# Altium PCB MainPCB.PcbDoc (part 3 of 4)
Units mil, origin at the board's own origin, x right, y up, seen from the top; angles counter-clockwise.
Board outline 3543.31 x 3543.31 mil, 2 copper layers (Top Layer, Bottom Layer); 134 components, 141 nets, 686 pads, 3686 vias.
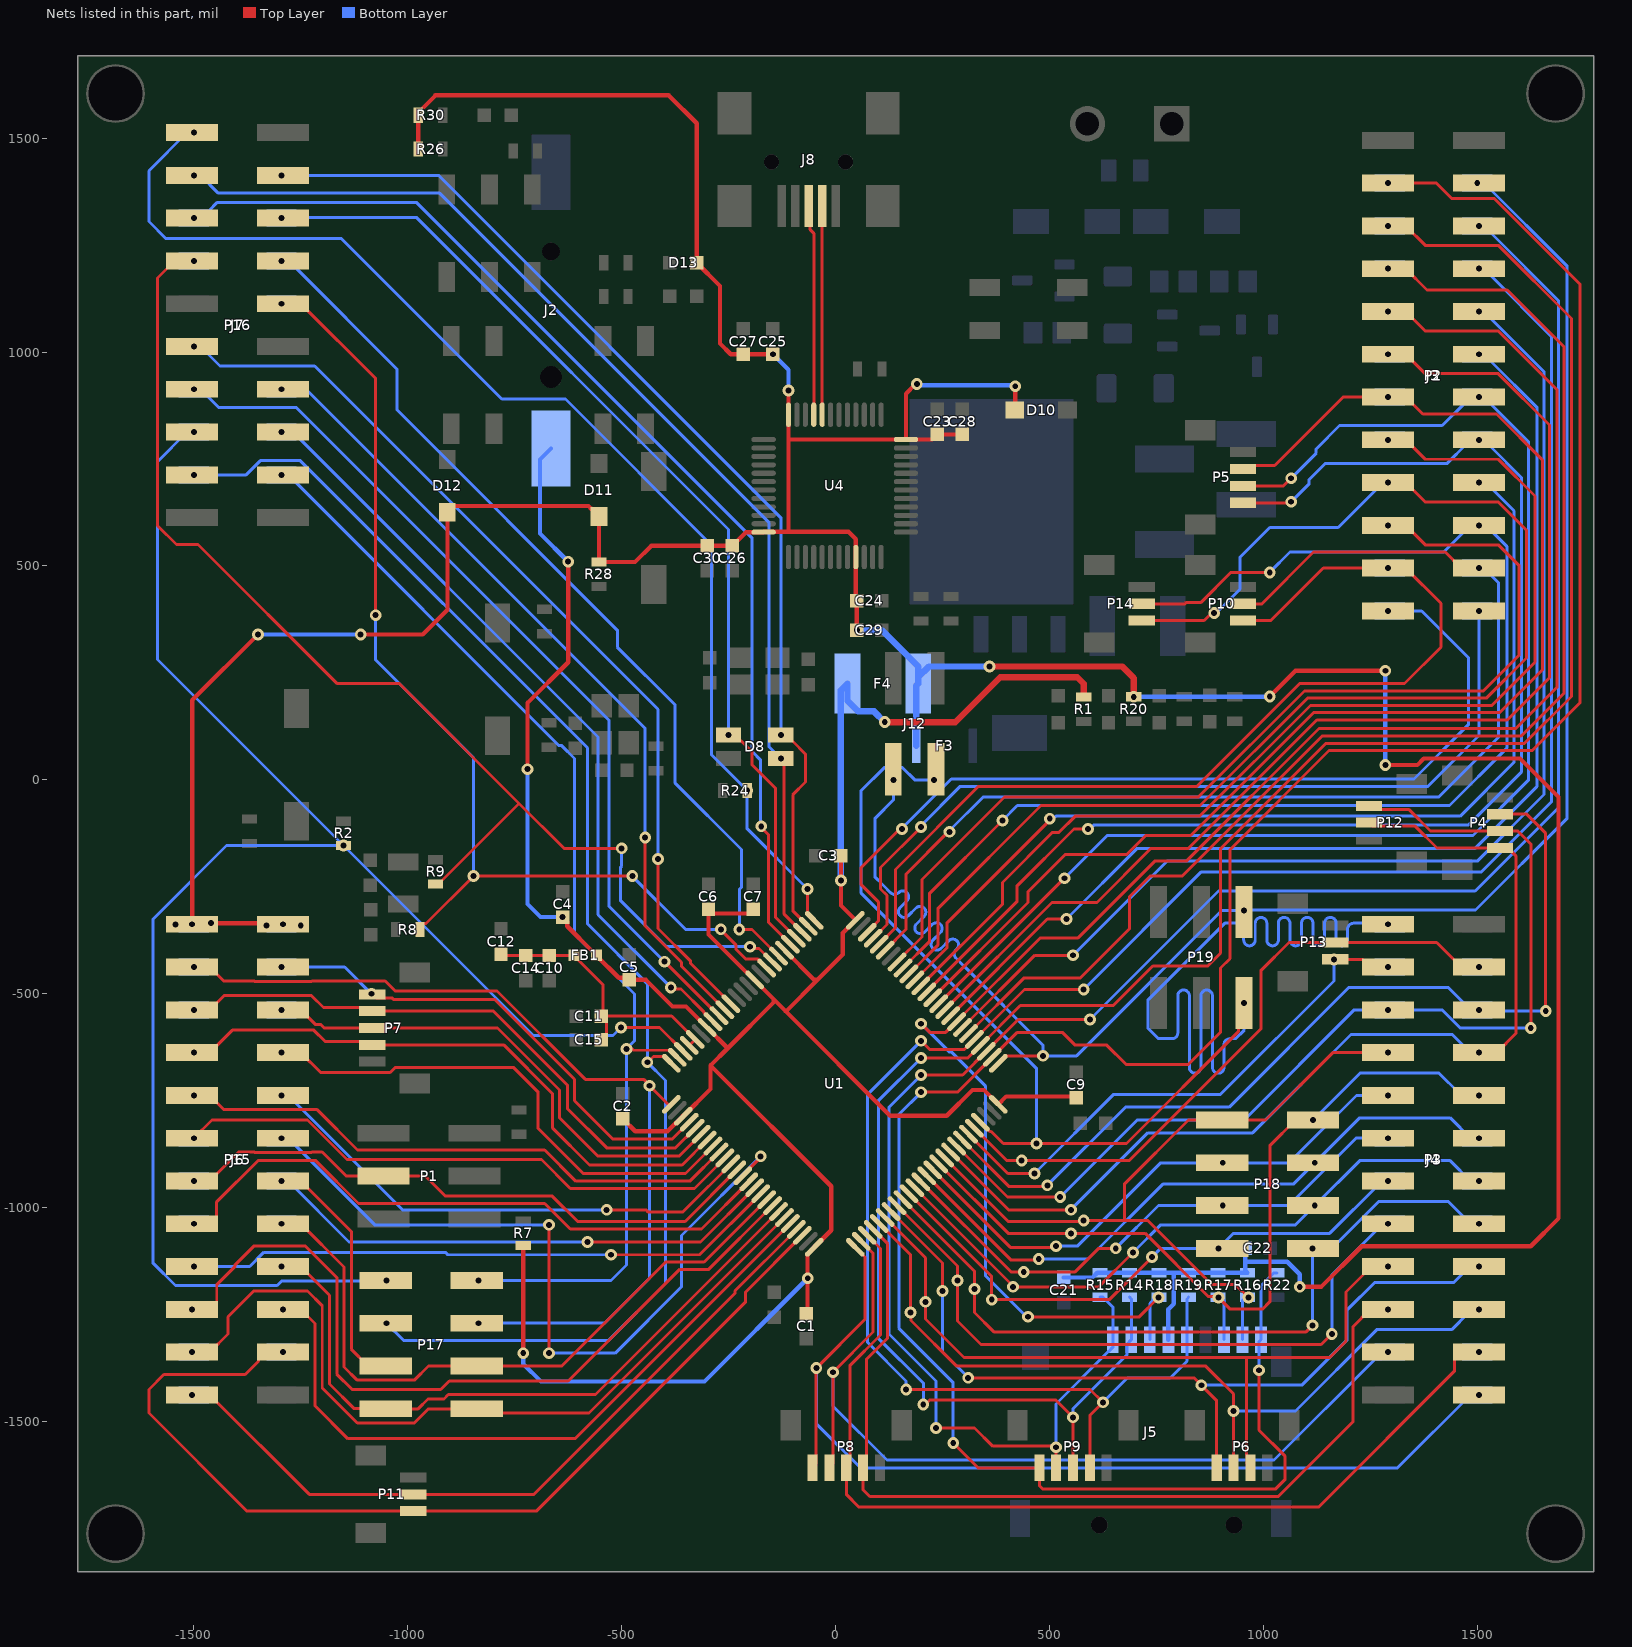
[diagram p2: the nets of this part, all layers, seen from the top]

## Via types
v1: diameter 15/15 (per signal layer), hole 10, Top Layer to Bottom Layer, tented both sides, 3436 vias
v2: diameter 27.56, hole 13.78, Top Layer to Bottom Layer, 250 vias

## Nets (pads, with @x,y where several pads share a name; then routed paths per layer and width w, separated by ;. In a path a pad name is that pad's centre, name@x,y a point inside that pad or via, vN(x,y) a via of type N, cw(c..) or ccw(c..) an arc to the next point about the centre after c; other vN are vias at no path point) (continued)
3V3_MCU: C1.2 C2.2 C3.2 C4.2 C5.2 C6.2 C7.2 C9.2 F4.1 FB1.1 J2.P R1.2 R7.2 U1.6 U1.11 U1.19 U1.28 U1.50 U1.75 U1.100 | length 7027.3
  Top Layer w10: v2(-730,-1340) R7.2@-730,-1088.54 ; v2(-720,25) -720,180 -625,275 v2(-625,510) ; v2(-638,-320.58) -627.25,-331.33 -627.25,-342.16 -568.19,-401.22 -566.22,-401.22 -558.43,-409.02 FB1.1@-558.43,-410 -558.43,-410.98 -506.89,-462.52 -487.01,-462.52 C5.2@-482,-467.53 -443.17,-467.53 -381.09,-529.61 -349.63,-529.61 U1.19@-300.34,-578.89 -252.12,-627.12 ; C2.2@-497,-792.53 -468.03,-821.5 -392.95,-821.5 -357.75,-786.29 U1.28@-356.02,-786.29 -292.36,-722.64 -292.36,-667.36 ; C6.2@-297,-302.53 C6.2@-297,-312.53 ; C7.2@-192,-302.53 -202,-312.53 C6.2@-297,-312.53 ; U1.11@-188.99,-468.45 -188.57,-468.45 -172.08,-484.94 -172.08,-485.36 -144.15,-513.29 ; U1.11@-188.99,-467.54 -190.71,-467.54 -297,-361.25 C6.2@-297,-312.53 ; U1.6@-119.39,-397.94 -50.31,-467.02 -42.02,-467.02 ; C1.2@-68,-1247.47 -65.8,-1245.27 -65.8,-1108.53 U1.50@-49.79,-1092.52 -10,-1052.73 -10,-949.73 -292.36,-667.36 ; C3.2@12.53,-177 v2(12.53,-235.22) 12.53,-293.44 46.25,-327.16 U1.100@46.25,-328.34 16.9,-357.7 16.9,-408.1 -42.02,-467.02 ; C9.2@563,-742.53 560.47,-740 398.77,-740 U1.75@380.32,-758.46 346.86,-725 320,-725 260,-785 127.56,-785 -116.22,-541.22 ; -292.36,-667.36 -252.12,-627.12 ; -252.12,-627.12 -144.15,-519.15 -144.15,-513.29 ; -144.15,-513.29 -116.22,-541.22 ; -116.22,-541.22 -42.02,-467.02
  Top Layer w15: v2(115,135) 280,135 385,240 565,240 580,225 R1.2@580,193.54
  Bottom Layer w10: v2(-730,-1340) -730,-1365 -688.54,-1406.46 -306.46,-1406.46 v2(-65,-1165) ; v2(-720,25) -720,-290 -689.42,-320.58 v2(-638,-320.58) ; J2.P@-665,774.37 -690.75,748.62 -690.75,575.75 v2(-625,510)
  Bottom Layer w15: v2(12.53,-235.22) 12.53,209.53 F4.1@28,225 28,185 53,160 90,160 v2(115,135)
3V3_MCU_VCCA: C10.2 C11.2 C12.2 C14.2 C15.2 FB1.2 U1.21 U1.22 | length 664
  Top Layer w7: C12.2@-782,-407.53 -779,-410.53 C14.2@-724,-410.53 -723.47,-410 -669,-410 FB1.2@-611.57,-410 ; FB1.2@-611.57,-410.98 -544,-478.56 -544,-548.53 C11.2@-547.47,-552 ; C15.2@-547.47,-607 -535.39,-594.92 -535.39,-570.39 ; -535.47,-570.39 -535.47,-560.53 -544,-552 -382.92,-552 U1.21@-328.18,-606.73 U1.22@-342.1,-620.65
3V3_STL: C21.2 C22.2 C23.2 C24.2 C25.2 C26.2 C27.2 C28.2 C29.2 C30.2 D10.K D11.K D12.K D13.2 F3.1 F4.0 J5.4 J6.1 J6.2 P15.1 P15.2 R14.2 R15.2 R16.2 R17.2 R18.2 R19.2 R20.2 R26.2 R28.2 R30.1 U4.9 U4.24 U4.36 U4.48 | length 10316.6
  Top Layer w10: v2(-1503.94,-337.6) -1503.94,186.06 v2(-1350,340) ; v2(-1460,-335) -1335,-335 v2(-1330,-340) ; v2(-1110,340) -965,340 -907.28,397.72 D12.K@-907.28,625.39 -907.28,625.51 -892.8,640 -577.4,640 -570,632.6 -567.44,632.6 -552.95,618.11 D11.K@-552.95,615.55 R28.2@-552.95,509.06 -468.85,509.06 -430.5,547.41 C30.2@-300.05,547.41 C26.2@-240.99,547.41 -209.46,578.94 U4.48@-168.11,578.94 ; R26.2@-975.2,1474.61 R30.1@-975.2,1553.35 -975.2,1560.24 -935.43,1600 -390,1600 -324.61,1534.61 D13.2@-324.61,1208.86 -270,1154.25 -270,1020 -244.95,994.95 C27.2@-215.31,994.95 v2(-146.41,994.95) v2(-146.41,994.95) ; U4.48@-168.11,580 -110,580 ; v2(-110.04,910) U4.36@-110.04,853.54 -110.04,795 ; C29.2@49.44,349.56 C24.2@49.44,418.46 47.44,420.46 U4.9@47.44,520.87 47.44,562.56 30,580 -110,580 ; v2(190,925) 186.91,925 164.57,902.66 U4.24@164.57,795.47 ; C28.2@296.5,807.32 C23.2@237.45,807.32 225.61,795.47 U4.24@164.57,795.47 ; D10.K@418.7,864.37 420,865.67 v2(420,920) ; v2(1015,195) 1075,255 v2(1285,255) ; v2(1085,-1185) 1135,-1185 1230,-1090 1625,-1090 1690,-1025 1690,-40 1600,50 1374.88,50 1359.88,35 v2(1285,35) ; -110.04,795 -110.04,580.04 -110,580 ; -110.04,795 -109.57,795.47 U4.24@164.57,795.47
  Top Layer w15: v2(360,265) 670,265 697.05,237.95 v2(697.05,194.09)
  Bottom Layer w10: v2(-1350,340) v2(-1110,340) ; v2(-146.41,994.95) -110.04,958.58 v2(-110.04,910) ; v2(190,925) 192.5,922.5 417.5,922.5 v2(420,920) ; C21.2@532.88,-1163.02 600.72,-1163.02 611.57,-1152.17 R15.2@618.46,-1152.17 R14.2@687.36,-1152.17 R18.2@756.26,-1152.17 790.71,-1152.17 ; v2(697.05,194.09) 1014.09,194.09 v2(1015,195) ; J5.4@777.91,-1308.66 777.91,-1237.36 790.71,-1224.56 790.71,-1152.17 ; C22.2@957.47,-1095.27 957.47,-1126.34 ; v2(1085,-1185) 1085,-1155.56 1055.78,-1126.34 957.47,-1126.34 ; v2(1285,35) v2(1285,255) ; 790.71,-1152.17 R19.2@825.16,-1152.17 R17.2@894.06,-1152.17 R16.2@962.95,-1152.17 957.47,-1146.69 957.47,-1126.34
  Bottom Layer w15: v2(50,350) 108.41,350 193.41,265 F4.0@193.41,240 ; F3.1@189,80 189,220.59 F4.0@193.41,225 F4.0@193.41,240 ; v2(360,265) 218.41,265 F4.0@193.41,240
  other v2: -1250,-340 -1542.87,-338.1 -1291.34,-337.6
A0: J7.16 P16.15 P17.1 R2.1 U1.23 | length 4092.5
  Top Layer w7: v2(-501.26,-578.89) -411.71,-578.89 U1.23@-356.02,-634.57
  Bottom Layer w7: v2(-1500,812.99) -1515.75,812.99 -1585,743.74 -1585,281.46 v2(-1150,-153.54) ; v2(-1050,-1170) -1050.78,-1170.78 -1293.96,-1170.78 -1305.28,-1182.1 -1542.9,-1182.1 -1595,-1130 -1595,-325 -1423.54,-153.54 v2(-1150,-153.54) ; v2(-501.26,-578.89) -520.04,-597.67 -705.88,-597.67 v2(-1150,-153.54)
A1: J7.17 P16.18 P17.2 U1.24 | length 2700.7
  Top Layer w7: v2(-488.78,-628.74) -485.1,-625.06 -479.28,-625.06 -472.34,-632 -386.43,-632 U1.24@-369.94,-648.49
  Bottom Layer w7: v2(-1295.28,712.99) -1279.53,712.99 -646.54,80 -640,80 -610,50 -610,-360.68 -470,-500.68 -470,-609.96 v2(-488.78,-628.74) -488.78,-1133.78 -525,-1170 v2(-835,-1170)
A2: J7.18 P16.17 P17.3 U1.25 | length 3332.4
  Top Layer w7: v2(-440,-660) -439.22,-660 -425.62,-646.4 -399.87,-646.4 U1.25@-383.86,-662.41
  Bottom Layer w7: v2(-1500,712.99) -1377.75,712.99 -1344.57,746.18 -1251.18,746.18 -580,75 -580,-336.61 -440,-476.61 v2(-440,-660) -397.28,-702.72 -397.28,-1177.28 -530,-1310 -1010,-1310 v2(-1050,-1270)
A3: J6.4 P15.3 P17.4 U1.26 | length 2171
  Top Layer w7: v2(-1500,-437.6) -1462.6,-437.6 -1430.2,-470 -1358.74,-470 -1357.95,-470.78 -1224.72,-470.78 -1223.94,-470 -1052.76,-470 -1029.37,-493.39 -791.61,-493.39 -585,-700 -448.54,-700 -438.54,-710 -435,-710 v2(-435,-715) -389.27,-760.73 -386.13,-760.73 U1.26@-383.86,-758.46 U1.26@-400.14,-774.73
  Bottom Layer w7: v2(-835,-1270) -540,-1270 -435,-1165 v2(-435,-715)
A4: J6.3 P7.1 P15.4 U1.29 | length 1163
  Top Layer w7: P7.1@-1082.91,-501.26 -1074.6,-509.57 -1037.23,-509.57 -1033.73,-513.07 -796.93,-513.07 -610,-700 -610,-750 -520,-840 -382.28,-840 -342.5,-800.21 U1.29@-342.1,-800.21
  Bottom Layer w7: v2(-1295.28,-437.6) -1147.4,-437.6 v2(-1085,-500)
A5: J6.6 P7.2 P15.5 U1.30 | length 1384.1
  Top Layer w7: v2(-1500,-537.6) -1462.6,-537.6 -1429.41,-504.41 -1224.72,-504.41 -1196.82,-532.32 -1091.22,-532.32 P7.2@-1082.91,-540.63 -799.37,-540.63 -627,-713 -627,-768 -535,-860 -374.05,-860 U1.30@-328.18,-814.13
A6: J6.5 P7.3 P15.6 U1.31 | length 1182.2
  Top Layer w7: v2(-1295.28,-537.6) P15.6@-1291.34,-537.6 -1250,-537.6 -1216.26,-571.33 -1204.01,-571.33 -1195.34,-580 P7.3@-1082.91,-580 -790,-580 -645,-725 -645,-790 -555.28,-879.72 -365.93,-879.72 U1.31@-314.26,-828.05
A7: J6.8 P7.4 P15.7 U1.32 | length 1422.8
  Top Layer w7: v2(-1500,-637.6) -1462.6,-637.6 -1410,-585 -1219.62,-585 -1193.56,-611.06 -1091.22,-611.06 P7.4@-1082.91,-619.37 -775.63,-619.37 -662,-733 -662,-813 -575,-900 -358.37,-900 U1.32@-300.34,-841.97
A8: J4.7 P3.8 P4.1 P12.2 U1.67 | length 2369.5
  Top Layer w7: U1.67@268.96,-869.81 404.15,-1005 v2(550,-1005) ; P12.2@1247.09,-100 1255.4,-108.31 1354.96,-108.31 1405.7,-159.05 1571.61,-159.05 1590,-177.44 1590,-592.87 1545.28,-637.6 v2(1503.94,-637.6)
  Bottom Layer w7: v2(550,-1005) 730,-825 975,-825 1205,-595 1441.65,-595 1484.25,-637.6 J4.7@1500,-637.6
A9: J4.6 P3.5 P4.2 P12.1 U1.68 | length 2435.1
  Top Layer w7: U1.68@282.88,-855.89 401.99,-975 v2(525,-975) ; P12.1@1247.09,-60.63 1255.4,-68.94 1339.63,-68.94 1390.37,-119.68 P4.2@1552.91,-119.68 1594.69,-119.68 1625,-150 v2(1625,-580)
  Bottom Layer w7: v2(525,-975) 705,-795 955,-795 1212.4,-537.6 v2(1291.34,-537.6) J4.6@1295.28,-537.6 1417.6,-537.6 1460,-580 v2(1625,-580)
A10: J4.5 P3.6 P4.3 U1.69 | length 2160
  Top Layer w7: U1.69@296.8,-841.97 404.83,-950 492.72,-950 v2(495,-947.72) ; P4.3@1552.91,-80.31 1615.31,-80.31 1660,-125 v2(1660,-540)
  Bottom Layer w7: v2(495,-947.72) 677.72,-765 920,-765 1200,-485 1431.65,-485 1484.25,-537.6 J4.5@1500,-537.6 ; v2(1503.94,-537.6) 1506.34,-540 v2(1660,-540)
A11: J4.4 P3.3 P13.1 U1.70 | length 1259.7
  Top Layer w7: U1.70@310.72,-828.05 402.67,-920 v2(465,-920) ; P13.1@1167.91,-419.37 1231.77,-419.37 1250,-437.6 v2(1291.34,-437.6)
  Bottom Layer w7: v2(465,-920) 650,-735 900,-735 1165,-470 v2(1165,-420)
A12: J4.3 P3.4 P13.2 U1.71 | length 1525.6
  Top Layer w7: U1.71@324.64,-814.13 400.51,-890 v2(435,-890) 686.1,-890 995,-581.1 995,-445 1060,-380 P13.2@1167.91,-380 1405,-380 1462.6,-437.6 v2(1503.94,-437.6)
A13: J4.2 J12.2 P3.1 P19.2 U1.72 | length 4254.3
  Top Layer w7: U1.72@338.56,-800.21 338.95,-800.21 360.45,-821.71 363.85,-821.71 392.14,-850 v2(470,-850) 680,-850 941.28,-588.72 941.28,-535.02 v2(955,-521.3)
  Bottom Layer w7: v2(230,0) 185,0 156.42,28.58 113.58,28.58 60,-25 60,-265 470,-675 v2(470,-850) ; v2(955,-521.3) 955,-585 935,-605 925,-605 921.5,-605 ccw(c921.5,-618.5) 908,-618.5 908,-672.28 cw(c894.5,-672.28) 881,-672.28 881,-504.76 ccw(c867.5,-504.76) 854,-504.76 854,-672.28 cw(c840.5,-672.28) 827,-672.28 827,-504.76 ccw(c813.5,-504.76) 800,-504.76 800,-591.5 cw(c786.5,-591.5) 786.5,-605 757.5,-605 755,-605 730,-580 730,-515 910,-335 940.5,-335 cw(c940.5,-348.5) 954,-348.5 954,-374.35 ccw(c967.5,-374.35) 981,-374.35 981,-334.91 cw(c994.5,-334.91) 1008,-334.91 1008,-374.35 ccw(c1021.5,-374.35) 1035,-374.35 1035,-334.91 cw(c1048.5,-334.91) 1062,-334.91 1062,-374.35 ccw(c1075.5,-374.35) 1089,-374.35 1089,-334.91 cw(c1102.5,-334.91) 1116,-334.91 1116,-374.35 ccw(c1129.5,-374.35) 1143,-374.35 1143,-334.91 cw(c1156.5,-334.91) 1170,-334.91 1170,-374.35 ccw(c1183.5,-374.35) 1197,-374.35 1197,-348.5 cw(c1210.5,-348.5) 1210.5,-335 1263.84,-335 1288.74,-335 v2(1291.34,-337.6)
A14: J3.22 J12.4 P2.21 P19.1 U1.76 | length 4249
  Top Layer w7: U1.76@380.32,-662.41 397.03,-645.7 484.3,-645.7 v2(485,-645)
  Bottom Layer w7: v2(135,0) 135,-47.29 92.72,-89.57 92.72,-227.72 108.47,-243.47 110.94,-245.94 128.59,-263.59 ccw(c138.14,-254.04) 147.68,-263.59 147.74,-263.53 cw(c157.29,-273.08) 166.83,-263.53 cw(c157.29,-273.08) 166.83,-282.62 150.96,-298.5 ccw(c160.51,-308.04) 150.96,-317.59 ccw(c160.51,-308.04) 170.05,-317.59 188.04,-299.6 cw(c197.59,-309.14) 207.13,-299.6 cw(c197.59,-309.14) 207.13,-318.69 189.14,-336.68 ccw(c198.69,-346.23) 189.14,-355.77 ccw(c198.69,-346.23) 208.24,-355.77 226.23,-337.78 cw(c235.77,-347.33) 245.32,-337.78 cw(c235.77,-347.33) 245.32,-356.87 227.33,-374.86 ccw(c236.87,-384.41) 227.33,-393.96 ccw(c236.87,-384.41) 246.42,-393.96 264.41,-375.97 cw(c273.96,-385.51) 283.5,-375.96 cw(c273.96,-385.51) 283.5,-395.06 281.33,-397.23 ccw(c290.87,-406.78) 281.33,-416.33 300.42,-435.42 302.89,-437.89 485,-620 v2(485,-645) 563.58,-645 902.99,-305.59 954.41,-305.59 v2(955,-305) 955.59,-304.41 1495.59,-304.41 1710,-90 1710,1200.63 1515.75,1394.88 v2(1500,1394.88)
A15: J3.21 J5.CD P2.22 P9.1 R22.2 U1.77 | length 6019.1
  Top Layer w7: v2(200,-730) 284.89,-730 U1.77@366.4,-648.49 424.89,-590 530,-590 560,-620 634.02,-620 679.02,-665 825,-665 900,-590 900,-440 922,-418 922,-375.5 921.81,-375.32 921.81,-163.19 1153.5,68.5 1628.5,68.5 1740,180 1740,1158.62 1539.73,1358.89 1440.13,1358.89 1404.14,1394.88 v2(1291.34,1394.88) ; v2(275,-1550) 332.91,-1607.91 P9.1@476.26,-1607.91 476.26,-1649.26 485,-1658 1027.96,-1658 1050,-1635.96 1050,-1580 990,-1520 v2(990,-1380)
  Bottom Layer w7: v2(200,-730) 147.72,-782.28 147.72,-1281.76 275,-1409.04 v2(275,-1550) ; v2(990,-1380) 990,-1313.11 J5.CD@994.45,-1308.66 994.45,-1182.68 1024.96,-1152.17 R22.2@1031.85,-1152.17
B0: J6.12 P15.11 U1.35 | length 1354.9
  Top Layer w7: v2(-1500,-837.6) -1457.4,-795 -1234.14,-795 -1141.72,-887.41 -687.59,-887.41 -620,-955 -329.86,-955 U1.35@-258.59,-883.73
B1: J6.9 P15.10 U1.36 | length 1209.6
  Top Layer w7: v2(-535,-1005) -443.32,-1005 -438.76,-1009.56 -356.58,-1009.56 -347.02,-1000 U1.36@-244.67,-897.65
  Bottom Layer w7: v2(-1295.28,-737.6) -1279.53,-737.6 -1012.13,-1005 v2(-535,-1005)
B2: J6.14 P1.4 P15.13 U1.37 | length 1415.1
  Top Layer w7: v2(-1500,-937.6) -1462.6,-937.6 -1395,-870 -1358.74,-870 -1357.95,-870.78 -1224.72,-870.78 -1223.94,-870 -1200,-870 -1143.9,-926.1 P1.4@-1056.5,-926.1 -958.9,-926.1 -912,-973 -662,-973 -602.72,-1032.28 -351.46,-1032.28 U1.37@-230.75,-911.57
B3: J3.9 P2.10 U1.89 | length 2565.4
  Top Layer w7: U1.89@199.36,-481.46 390,-290.82 390,-240 507.28,-122.72 522.28,-122.72 560,-85 850.96,-85 1109.96,174 1534,174 1635,275 1635,663.62 1549.19,749.43 1378.13,749.43 1332.68,794.88 v2(1291.34,794.88)
B4: J3.8 P2.7 U1.90 | length 2344.6
  Top Layer w7: U1.90@185.44,-467.54 260,-392.98 260,-335 500.71,-94.29 v2(500.71,-90.71)
  Bottom Layer w7: v2(500.71,-90.71) 504.64,-86.78 513.31,-86.78 515.09,-85 1460,-85 1586,41 1586,629 1536.3,678.7 1520.12,678.7 v2(1503.94,694.88)
B5: J3.7 P2.8 P14.1 U1.91 | length 3143.4
  Top Layer w7: U1.91@171.53,-453.62 240,-385.14 240,-300 480,-60 851.92,-60 1102.92,191 1521,191 1615,285 1615,583.62 1549.19,649.43 1378.13,649.43 P2.8@1332.68,694.88 ; P14.1@715.75,372.24 861.68,372.24 879.44,390 v2(885,390)
  Bottom Layer w7: v2(885,390) 890,390 945.59,445.59 945.59,520.59 1015,590 1175,590 J3.7@1262.45,677.45
  other v2: 1291.34,694.88
B6: J3.6 P2.5 P14.2 U1.92 | length 3107.4
  Top Layer w7: U1.92@157.61,-439.7 220,-377.31 220,-265 v2(390,-95) ; P14.2@715.75,411.61 816.61,411.61 820,415 854.57,415 924.57,485 v2(1015,485)
  Bottom Layer w7: v2(390,-95) 425,-60 1435,-60 1569,74 1569,546 1536.3,578.7 1520.12,578.7 v2(1503.94,594.88) ; v2(1015,485) 1062.5,532.5 1421.87,532.5 1484.25,594.88 J3.6@1500,594.88
B7: J3.5 P2.6 U1.93 | length 2384.7
  Top Layer w7: U1.93@143.69,-425.78 143.69,-425.39 202,-367.07 202,-233 395,-40 847.88,-40 1095.88,208 1513.96,208 1598,292.04 1598,500.62 1549.19,549.43 1378.13,549.43 1332.68,594.88 v2(1291.34,594.88)
B8: J3.4 P2.3 P10.2 U1.95 | length 2756
  Top Layer w7: U1.95@115.85,-397.94 165,-348.79 165,-220 263.52,-121.48 v2(266.48,-121.48) ; P10.2@951.97,411.61 996.61,411.61 1117.43,532.43 1425.05,532.43 1462.6,494.88 v2(1503.94,494.88)
  Bottom Layer w7: v2(266.48,-121.48) 266.48,-118.52 345,-40 1410,-40 1550,100 1550,460 1531.93,478.07 1531.93,478.7 1515.75,494.88 v2(1503.94,494.88)
B9: J3.3 P2.4 P10.1 U1.96 | length 2331.1
  Top Layer w7: U1.96@101.93,-384.02 140,-345.95 140,-209.38 334.38,-15 845,-15 1085,225 1330,225 1415,310 1415,412.56 1332.68,494.88 v2(1291.34,494.88) 1291.22,495 1140,495 1017.24,372.24 P10.1@951.97,372.24
B10: J6.24 P11.2 P15.23 U1.47 | length 1768.5
  Top Layer w7: v2(-1503.94,-1437.6) -1462.6,-1437.6 -1230.2,-1670 P11.2@-987.09,-1670 -705,-1670 -235,-1200 -235,-1194.21 U1.47@-91.55,-1050.76
B11: J6.21 P11.1 P15.22 U1.48 | length 2310.7
  Top Layer w7: v2(-1291.34,-1337.6) -1332.68,-1337.6 -1348.86,-1353.78 -1348.86,-1358.86 -1380,-1390 -1570,-1390 -1605,-1425 -1605,-1480 -1375.63,-1709.37 P11.1@-987.09,-1709.37 -699.37,-1709.37 -210,-1220 -210,-1197.05 U1.48@-77.63,-1064.68
B12: J4.23 P3.24 P8.1 U1.51 | length 2363.9
  Top Layer w7: P8.1@-53.74,-1607.91 -45.43,-1599.6 -45.43,-1375.43 v2(-45,-1375) 68.97,-1261.03 68.97,-1115.24 U1.51@46.25,-1092.52
  Bottom Layer w7: v2(-45,-1375) -45,-1505 58.08,-1608.08 1313.77,-1608.08 1484.25,-1437.6 J4.23@1500,-1437.6
  other v2: 1503.94,-1437.6
B13: J4.22 P3.21 P8.2 U1.52 | length 2120.5
  Top Layer w7: P8.2@-14.37,-1607.91 -6.06,-1599.6 v2(-6.06,-1384.56) 87.78,-1290.72 87.78,-1106.21 U1.52@60.17,-1078.6
  Bottom Layer w7: v2(-6.06,-1384.56) -6.06,-1463.94 120,-1590 1025,-1590 1261.22,-1353.78 1275.15,-1353.78 v2(1291.34,-1337.6) J4.22@1295.28,-1337.6
B14: J4.21 P3.22 P8.3 U1.53 | length 2309.3
  Top Layer w7: U1.53@74.09,-1064.68 104.78,-1095.37 104.78,-1297.76 33.31,-1369.23 33.31,-1599.6 P8.3@25,-1607.91 25,-1670 55,-1700 1128.74,-1700 1446.41,-1382.32 1446.41,-1353.78 1462.6,-1337.6 v2(1503.94,-1337.6)
B15: J4.20 P3.19 P8.4 U1.54 | length 2191.3
  Top Layer w7: U1.54@88.01,-1050.76 121.78,-1084.53 121.78,-1304.8 72.68,-1353.9 72.68,-1599.6 P8.4@64.37,-1607.91 64.37,-1659.37 80,-1675 1035,-1675 1210,-1500 1210,-1277.6 1250,-1237.6 v2(1291.34,-1237.6)
C0: J7.12 P16.11 U1.15 | length 2195
  Top Layer w7: v2(-415,-185) -415,-347.38 -338.62,-423.76 -338.62,-429.26 U1.15@-244.67,-523.22
  Bottom Layer w7: v2(-1500,1012.99) -1484.25,1012.99 -1438.8,967.54 -1217.54,967.54 -415,165 v2(-415,-185)
C1: J7.13 P16.14 U1.16 | length 1913.1
  Top Layer w7: v2(-445,-135) -445,-341.42 -360,-426.42 -360,-435.72 U1.16@-258.59,-537.14
  Bottom Layer w7: v2(-1295.28,912.99) -1237.99,912.99 -445,120 v2(-445,-135)
C2: J7.14 P16.13 U1.17 | length 2088.7
  Top Layer w7: v2(-400,-425) -398.96,-425 -272.9,-551.06 U1.17@-272.5,-551.06
  Bottom Layer w7: v2(-1500,912.99) -1484.25,912.99 -1441.26,870 -1260,870 -530,140 -530,-295 v2(-400,-425)
C3: J7.15 P16.16 U1.18 | length 1823.5
  Top Layer w7: v2(-385,-485) -381.07,-488.93 -361.07,-488.93 -307.92,-542.08 -307.92,-543.09 -286.42,-564.58 U1.18@-286.42,-564.98
  Bottom Layer w7: v2(-1295.28,812.99) -1280.93,798.65 -1253.65,798.65 -555,100 -555,-315 v2(-385,-485)
C4: J6.7 P15.8 U1.33 | length 1207.6
  Top Layer w7: P15.8@-1291.34,-637.6 -1250,-637.6 -1203.55,-684.05 -1041.18,-684.05 -1029.93,-672.8 -752.2,-672.8 -695,-730 -695,-815 -590,-920 -350.53,-920 U1.33@-286.42,-855.89
  other v2: -1295.28,-637.6
C5: J6.10 P15.9 U1.34 | length 1338.7
  Top Layer w7: v2(-1500,-737.6) -1462.6,-737.6 -1429.41,-770.78 -1211.62,-770.78 -1117.4,-865 -680,-865 -607,-938 -340.69,-938 U1.34@-272.5,-869.81
C6: J4.11 P3.12 P18.4 U1.63 | length 1525.9
  Top Layer w7: U1.63@213.28,-925.49 410.52,-1122.72 472.28,-1122.72 v2(475,-1120)
  Bottom Layer w7: v2(475,-1120) 590,-1120 765,-945 1070,-945 v2(1120,-895) 1225,-790 1436.65,-790 1484.25,-837.6 J4.11@1500,-837.6
  other v2: 1503.94,-837.6
C7: J4.10 P3.9 P18.3 U1.64 | length 1286.3
  Top Layer w7: U1.64@227.2,-911.57 408.35,-1092.72 512.28,-1092.72 v2(515,-1090)
  Bottom Layer w7: v2(515,-1090) 565,-1090 760,-895 v2(905,-895) 1060,-895 1217.4,-737.6 v2(1291.34,-737.6)
C8: J4.9 J5.7 P3.10 P18.2 R17.1 U1.65 | length 1956.9
  Top Layer w7: U1.65@241.12,-897.65 403.47,-1060 723.58,-1060 870.72,-1207.14 889.99,-1207.14 891.07,-1206.07 922.28,-1237.28 997.72,-1237.28 1015,-1220 1015,-854.96 1074.96,-795 v2(1116.3,-795)
  Bottom Layer w7: J5.7@907.83,-1308.66 R17.1@907.83,-1216.58 ; v2(1116.3,-795) 1226.3,-685 1410,-685 1458.17,-733.17 1495.57,-733.17 J4.9@1500,-737.6
  other v2: 895,-1210 550,-1060 1503.94,-737.6
C9: J4.8 J5.8 P3.7 P18.1 R16.1 U1.66 | length 1784.9
  Top Layer w7: U1.66@255.04,-883.73 403.59,-1032.28 577.72,-1032.28 v2(580,-1030) 675,-1030 ; v2(965,-1210) 935,-1180 880,-1180 730,-1030 675,-1030 ; v2(1291.34,-637.6) 1162.4,-637.6 1005,-795 P18.1@903.7,-795 825,-795 675,-945 675,-1030
  Bottom Layer w7: J5.8@951.14,-1308.66 951.14,-1216.58 958.47,-1209.25 R16.1@962.95,-1209.25 964.25,-1209.25 v2(965,-1210)
C10: J3.20 J5.1 P2.19 P9.2 R15.1 U1.78 | length 4863.7
  Top Layer w7: v2(200,-690) 297.05,-690 U1.78@352.48,-634.57 427.05,-560 v2(595,-560) ; v2(235,-1515) 325,-1515 367.44,-1557.44 512.44,-1557.44 v2(515,-1560) 515,-1607.28 P9.2@515.63,-1607.91
  Bottom Layer w7: v2(200,-690) 125,-765 125,-1295 235,-1405 v2(235,-1515) ; v2(515,-1560) 515,-1458.61 636.95,-1336.66 637.71,-1336.66 647.99,-1326.38 J5.1@647.99,-1308.66 647.99,-1231.89 625.35,-1209.25 R15.1@618.46,-1209.25 ; v2(595,-560) 895,-260 1495,-260 1690,-65 1690,1120 1531.93,1278.07 1531.93,1278.7 1515.75,1294.88 v2(1503.94,1294.88)
C11: J3.19 J5.2 P2.20 P9.3 R14.1 U1.79 | length 5137.3
  Top Layer w7: v2(200,-650) 309.21,-650 U1.79@338.56,-620.65 431.99,-527.22 572.22,-527.22 572.33,-527.33 649.17,-527.33 741.5,-435 870,-435 900,-405 900,-160.96 1146.46,85.5 1610.5,85.5 1720,195 1720,1078.62 1549.19,1249.43 1378.13,1249.43 1332.68,1294.88 v2(1291.34,1294.88) ; v2(205,-1460) 209.38,-1460 219.38,-1450 515,-1450 v2(555,-1490) P9.3@555,-1607.91
  Bottom Layer w7: v2(200,-650) 100,-750 100,-1305 205,-1410 v2(205,-1460) ; v2(555,-1490) 555.17,-1489.83 555.17,-1469.83 681.02,-1343.98 681.02,-1318.94 J5.2@691.3,-1308.66 691.3,-1213.19 R14.1@687.36,-1209.25
C12: J3.18 J5.5 P2.17 P9.4 R19.1 U1.80 | length 4973.8
  Top Layer w7: v2(165,-1425) 595,-1425 v2(625,-1455) 595,-1485 595,-1500 594.37,-1500.63 P9.4@594.37,-1607.91 ; v2(200,-610) 220,-630 300.98,-630 324.24,-606.73 U1.80@324.64,-606.73 441.37,-490 v2(580,-490)
  Bottom Layer w7: v2(165,-1425) 164.83,-1424.83 164.83,-1404.83 75,-1315 75,-735 v2(200,-610) ; v2(580,-490) 855,-215 1510,-215 1673,-52 1673,1037 1531.93,1178.07 1531.93,1178.7 1515.75,1194.88 v2(1503.94,1194.88) ; v2(625,-1455) 682.06,-1397.94 782.06,-1397.94 821.22,-1358.78 J5.5@821.22,-1308.66 821.22,-1213.19 R19.1@825.16,-1209.25
C13: J7.7 P16.8 U1.7 | length 2137.9
  Top Layer w7: v2(-225,-350) -195.17,-350 U1.7@-133.31,-411.86
  Bottom Layer w7: v2(-1295.28,1212.99) -1279.09,1196.81 -1261.81,1196.81 -1025,960 -1025,865 -510,350 -510,310 -375,175 -375,-7.62 -220,-162.62 -220,-251.03 -225,-256.03 v2(-225,-350)
C14: J7.8 P16.7 R9.2 U1.8 | length 2889.1
  Top Layer w7: v2(-1500,1212.99) P16.7@-1503.94,1212.99 -1545.28,1212.99 -1585,1173.27 -1585,645 -1585,594.25 -1540.75,550 -1490,550 -1165.67,225.67 -1020.67,225.67 -739.78,-55.22 ; R9.2@-935,-243.54 -928.11,-243.54 -739.78,-55.22 ; v2(-500,-160) -635,-160 -739.78,-55.22 ; v2(-200,-390) -196.07,-393.93 -179.08,-393.93 U1.8@-147.23,-425.78
  Bottom Layer w7: v2(-500,-160) -500,-201.76 -502.28,-204.04 -502.28,-282.72 -395,-390 v2(-200,-390)
C15: J7.9 P16.10 R8.1 U1.9 | length 2508
  Top Layer w7: P16.10@-1291.34,1112.99 -1250,1112.99 -1075,937.99 v2(-1075,385) ; R8.1@-971.46,-350 -971.46,-343.11 -964.13,-335.78 -957.24,-335.78 v2(-846.46,-225) v2(-475,-225) ; v2(-268.22,-349.33) -268.22,-350.36 -233.07,-385.51 -233.07,-395.51 -210.37,-418.21 -183.04,-418.21 -161.54,-439.7 U1.9@-161.15,-439.7
  Bottom Layer w7: v2(-1075,385) -1075,280 -846.46,51.46 v2(-846.46,-225) ; v2(-475,-225) -350.67,-349.33 v2(-268.22,-349.33)
  other v2: -1295.28,1112.99
D0: J3.17 P2.18 U1.81 | length 3062.3
  Top Layer w7: U1.81@310.72,-592.81 440.81,-462.72 572.28,-462.72 687.5,-347.5 687.5,-272.5 735,-225 810,-225 1137.5,102.5 1602.5,102.5 1703,203 1703,1012 1570,1145 1382.56,1145 1332.68,1194.88 v2(1291.34,1194.88)
D1: J3.16 P2.15 U1.82 | length 2783.7
  Top Layer w7: U1.82@296.8,-578.89 465.69,-410 v2(555,-410)
  Bottom Layer w7: v2(555,-410) 775,-190 1500,-190 1656,-34 1656,954 1531.93,1078.07 1531.93,1078.7 1515.75,1094.88 v2(1503.94,1094.88)
D2: J3.15 J5.3 P2.16 R18.1 U1.83 | length 4224.4
  Top Layer w7: v2(200,-570) 220,-590 257.46,-590 282.49,-564.98 U1.83@282.88,-564.98 477.86,-370 565.96,-370 745.96,-190 820,-190 1130,120 1590,120 1686,216 1686,912.62 1549.19,1049.43 1378.13,1049.43 1332.68,1094.88 v2(1291.34,1094.88) ; v2(450,-1255) 710,-1255 v2(755,-1210)
  Bottom Layer w7: v2(200,-570) 266.64,-636.64 271.64,-636.64 350,-715 350,-1158.58 446.42,-1255 v2(450,-1255) ; J5.3@735,-1308.66 735,-1223.62 749.37,-1209.25 R18.1@756.26,-1209.25
D3: J3.14 P2.13 U1.84 | length 2665.4
  Top Layer w7: U1.84@268.96,-551.06 495.02,-325 v2(540,-325)
  Bottom Layer w7: v2(540,-325) 705,-160 1495,-160 1639,-16 1639,871 1531.93,978.07 1531.93,978.7 1515.75,994.88 v2(1503.94,994.88)
D4: J3.13 P2.14 U1.85 | length 2772.2
  Top Layer w7: U1.85@255.04,-537.14 505.72,-286.46 611.04,-286.46 737.5,-160 825,-160 1125,140 1570,140 1669,239 1669,829.62 1549.19,949.43 1378.13,949.43 1332.68,994.88 v2(1291.34,994.88)
D5: J3.12 P2.11 P5.2 U1.86 | length 3185.8
  Top Layer w7: U1.86@241.12,-523.22 534.34,-230 v2(535,-230) ; P5.2@951.97,687.2 1047.2,687.2 v2(1065,705)
  Bottom Layer w7: v2(535,-230) 635,-130 1490,-130 1620,0 1620,790 1531.93,878.07 1531.93,878.7 1515.75,894.88 v2(1503.94,894.88) ; v2(1065,705) 1123.5,763.5 1123.5,773.5 1178.07,828.07 1418.07,828.07 1468.07,878.07 1468.07,878.7 1484.25,894.88 J3.12@1500,894.88
D6: J3.11 P2.12 P5.3 U1.87 | length 3078.5
  Top Layer w7: U1.87@227.2,-509.3 450,-286.5 450,-261.42 536.42,-175 680,-175 725,-130 830,-130 1117,157 1552,157 1652,257 1652,748 1545,855 1372.56,855 1332.68,894.88 v2(1291.34,894.88) 1186.4,894.88 1026.4,734.89 960.28,734.89 P5.3@951.97,726.57
D7: J3.10 P2.9 P5.1 U1.88 | length 3034.7
  Top Layer w7: U1.88@213.28,-495.38 423.66,-285 423.66,-248.5 557.16,-115 v2(590,-115) ; P5.1@951.97,647.83 952.51,647.29 1062.29,647.29 v2(1065,650)
  Bottom Layer w7: v2(590,-115) 594.38,-115 604.38,-105 1480,-105 1603,18 1603,707 1531.93,778.07 1531.93,778.7 1515.75,794.88 v2(1503.94,794.88) ; v2(1065,650) 1106.97,691.97 1106.97,701.97 1145,740 1430,740 J3.10@1475,785
D8: J4.19 P3.20 P6.2 U1.55 | length 1896.9
  Top Layer w7: U1.55@101.93,-1036.84 175,-1109.92 v2(175,-1245) 176.62,-1246.62 176.62,-1263.72 283.34,-1370.44 865.44,-1370.44 930,-1435 v2(930,-1475) 930,-1607.6 P6.2@930.32,-1607.91
  Bottom Layer w7: v2(930,-1475) 1075,-1475 1265,-1285 1440,-1285 J4.19@1477.5,-1247.5
  other v2: 1503.94,-1237.6
D9: J4.18 P3.17 P6.3 U1.56 | length 1813.4
  Top Layer w7: U1.56@115.85,-1022.92 210,-1117.08 v2(210,-1220) 210,-1260 300,-1350 960,-1350 ; P6.3@969.69,-1607.91 961.37,-1599.6 961.37,-1578.18 960,-1576.8 960,-1350 ; v2(1291.34,-1137.6) 1250,-1137.6 1233.82,-1153.78 1233.82,-1156.18 1193,-1197 1193,-1312 1155,-1350 960,-1350
D10: J4.17 P3.18 P6.1 U1.57 | length 2023.7
  Top Layer w7: U1.57@129.77,-1009 250,-1129.24 v2(250,-1195) ; v2(310,-1397.72) 837.72,-1397.72 890,-1450 890,-1606.97 P6.1@890.95,-1607.91
  Bottom Layer w7: v2(250,-1195) 250,-1337.19 v2@310,-1397.19 ; v2(855,-1415) 1090,-1415 1195,-1310 1195,-1240 1260.04,-1174.96 1445.04,-1174.96 1466.22,-1153.78 1483.81,-1153.78 J4.17@1500,-1137.6
  other v2: 1503.94,-1137.6
D11: J4.16 P3.15 U1.58 | length 1559.2
  Top Layer w7: U1.58@143.69,-995.09 285,-1136.4 v2(285,-1170) 285,-1265 340,-1320 1135,-1320 v2(1160,-1295)
  Bottom Layer w7: v2(1160,-1295) 1160,-1157.24 1263.34,-1053.89 1263.34,-1053.78 1279.53,-1037.6 J4.16@1295.28,-1037.6
  other v2: 1291.34,-1037.6
D12: J4.15 P3.16 P18.8 U1.59 | length 1780.4
  Top Layer w7: U1.59@157.61,-981.17 325,-1148.56 v2(325,-1190) 325,-1245 370,-1290 1100,-1290 v2(1115,-1275)
  Bottom Layer w7: v2(1115,-1275) v2(1115,-1095) 1160.28,-1095 1270.28,-985 1431.65,-985 1484.25,-1037.6 J4.15@1500,-1037.6
  other v2: 1503.94,-1037.6
D13: J4.14 P3.13 P18.7 U1.60 | length 1344.7
  Top Layer w7: U1.60@171.53,-967.25 365,-1160.72 v2(365,-1215) 640,-1215 v2(740,-1115)
  Bottom Layer w7: v2(740,-1115) 760,-1095 v2(895,-1095) 930,-1060 1155,-1060 J4.14@1270,-945
  other v2: 1291.34,-937.6
D14: J4.13 P3.14 P18.6 U1.61 | length 1553.7
  Top Layer w7: U1.61@185.44,-953.33 185.44,-953.72 415,-1183.28 v2(415,-1185) 615,-1185 v2(695,-1105)
  Bottom Layer w7: v2(695,-1105) 760,-1040 1075,-1040 v2(1120,-995) 1225,-890 1436.65,-890 1484.25,-937.6 J4.13@1500,-937.6
  other v2: 1503.94,-937.6
D15: J4.12 P3.11 P18.5 U1.62 | length 1313.4
  Top Layer w7: U1.62@199.36,-939.41 409.96,-1150 v2(440,-1150) 560,-1150 615,-1095 v2(655,-1095)
  Bottom Layer w7: v2(655,-1095) 755,-995 1059.14,-995 1217.61,-836.53 1294.21,-836.53 J4.12@1295.28,-837.6
  other v2: 905,-995 1291.34,-837.6
D_N: J8.2 U4.32 | length 489
  Top Layer w7: U4.32@-31.3,853.54 -31.3,1339.76 J8.2@-29.33,1341.73
D_P: J8.3 U4.33 | length 492.5
  Top Layer w7: J8.3@-60.83,1341.73 -59.32,1340.23 -59.32,1286.12 -50.7,1277.5 -50.7,853.82 U4.33@-50.98,853.54
E0: J3.2 P2.1 U1.97 | length 2004.5
  Top Layer w7: U1.97@88.01,-370.1 120,-338.11 120,-270 105,-255 105,-205 v2(200,-110)
  Bottom Layer w7: v2(200,-110) 200,-106.42 291.42,-15 1385,-15 1503.94,103.94 v2(1503.94,394.88)
E1: J3.1 P2.2 U1.98 | length 2127.3
  Top Layer w7: U1.98@74.09,-356.18 74.09,-355.79 100,-329.88 100,-285 60,-245 60,-205 150,-115 v2(155,-115)
  Bottom Layer w7: v2(155,-115) 155,-113.58 270.58,2 1352,2 1480,130 1480,285 1370.12,394.88 v2(1291.34,394.88)
E2: J7.2 P16.1 R24.1 U1.1 | length 2865.4
  Top Layer w7: U1.1@-65.8,-312.34 v2(-65.8,-255)
  Top Layer w9: U1.1@-65.8,-312.34 U1.1@-49.79,-328.34
  Bottom Layer w7: v2(-1500,1512.99) -1515.75,1512.99 -1605,1423.74 -1605,1305 -1565,1265 -1155,1265 -780,890 -631.47,890 -290,548.53 -290,58.54 v2(-206.46,-25) -206.46,-114.34 v2(-65.8,-255)
E3: D8.4 J7.3 P16.4 U1.2 | length 2512.9
  Top Layer w7: v2(-127.95,105.12) -114.74,91.9 -101.9,91.9 -70,60 -70,-5 -100,-35 -100,-305.98 U1.2@-63.71,-342.26
  Bottom Layer w7: v2(-1295.28,1412.99) -927.99,1412.99 -127.95,612.95 v2(-127.95,105.12)
E4: D8.3 J7.4 P16.3 U1.3 | length 2670.7
  Top Layer w7: v2(-127.95,50) -120,42.05 -120,-313.82 U1.3@-77.63,-356.18
  Bottom Layer w7: v2(-1500,1412.99) -1484.25,1412.99 -1442.65,1371.39 -925.43,1371.39 -155,600.96 -155,200 -155.23,199.77 -155.23,93.82 -155,93.59 -155,77.05 v2(-127.95,50)
E5: D8.2 J7.5 P16.6 U1.4 | length 2377.9
  Top Layer w7: v2(-250,105.12) -236.78,91.9 -221.9,91.9 -195,65 -195,35 -140,-20 -140,-321.66 U1.4@-91.55,-370.1
  Bottom Layer w7: v2(-1295.28,1312.99) -1293.27,1315 -980,1315 -250,585 v2(-250,105.12)
E6: J7.6 P16.5 U1.5 | length 2631.6
  Top Layer w7: v2(-173.61,-108.61) -173.61,-111.39 -157.06,-127.94 -157.06,-332.44 U1.5@-105.47,-384.02
  Bottom Layer w7: v2(-1500,1312.99) -1483.81,1329.18 -1465.82,1329.18 -1445,1350 -980,1350 -195,565 -195,66.1 -175,46.1 -175,-107.22 v2(-173.61,-108.61)
E7: J6.11 P15.12 U1.38 | length 1827.8
  Top Layer w7: v2(-670,-1340) v2(-670,-1040) ; U1.38@-216.83,-925.49 -216.83,-924.19 -175,-882.36 v2(-175,-880)
  Bottom Layer w7: v2(-1295.28,-837.6) -1279.53,-837.6 -1077.13,-1040 v2(-670,-1040) ; v2(-670,-1340) -515,-1340 -360,-1185 -360,-1065 v2(-175,-880)
E8: J6.16 P15.15 U1.39 | length 1490.2
  Top Layer w7: v2(-1500,-1037.6) -1463.67,-1037.6 -1447.49,-1021.41 -1447.49,-987.49 -1350,-890 -1215,-890 -1115,-990 -680,-990 -620,-1050 -313.5,-1050 U1.39@-202.91,-939.41
E9: J6.13 P15.14 P17.5 U1.40 | length 1801.9
  Top Layer w7: v2(-1295.28,-937.6) -1250,-937.6 -1131.81,-1055.78 -1131.81,-1330.82 -1092.64,-1370 P17.5@-1051.3,-1370 ; v2(-580,-1080) -315.66,-1080 U1.40@-188.99,-953.33
  Bottom Layer w7: v2(-1295.28,-937.6) -1279.53,-937.6 -1137.13,-1080 v2(-580,-1080)
E10: J6.18 P15.17 U1.41 | length 1400.1
  Top Layer w7: v2(-525,-1110) -317.82,-1110 U1.41@-175.07,-967.25
  Bottom Layer w7: v2(-1500,-1137.6) -1369.49,-1137.6 -1336.3,-1104.41 -911.83,-1104.41 -906.25,-1110 v2(-525,-1110)
E11: J6.15 P15.16 P17.6 U1.42 | length 1597.1
  Top Layer w7: v2(-1295.28,-1037.6) P15.16@-1291.34,-1037.6 -1250,-1037.6 -1148.81,-1138.78 -1148.81,-1372.28 -1117.91,-1403.19 -984.68,-1403.19 -951.5,-1370 P17.6@-838.7,-1370 -640,-1370 -397,-1127 -306.98,-1127 U1.42@-161.15,-981.17
E12: J6.20 P15.19 U1.43 | length 1893.4
  Top Layer w7: v2(-1503.94,-1237.6) -1462.6,-1237.6 -1446.41,-1221.41 -1446.41,-1179.88 -1403.21,-1136.67 -1403.21,-1133.21 -1360,-1090 -1239.14,-1090 -1165.81,-1163.32 -1165.81,-1389.19 -1130,-1425 -922.94,-1425 -902.94,-1405 -625,-1405 -364,-1144 -296.14,-1144 U1.43@-147.23,-995.09
E13: J6.17 P15.18 P17.7 U1.44 | length 1612.1
  Top Layer w7: v2(-1295.28,-1137.6) P15.18@-1291.34,-1137.6 -1250,-1137.6 -1182.81,-1204.78 -1182.81,-1412.19 -1125.2,-1469.8 -1051.5,-1469.8 P17.7@-1051.3,-1470 -975.54,-1470 -952.54,-1447 -915.5,-1447 -905.12,-1436.62 -560.92,-1436.62 U1.44@-133.31,-1009
E14: J6.22 P15.21 P17.8 U1.45 | length 1916.9
  Top Layer w7: v2(-1503.94,-1337.6) -1462.6,-1337.6 -1420,-1295 -1420,-1255 -1360,-1195 -1234.14,-1195 -1199.81,-1229.32 -1199.81,-1421.28 -1117.91,-1503.19 -984.68,-1503.19 -951.5,-1470 P17.8@-841.2,-1470 ; P17.8@-838.7,-1470 P17.8@-841.2,-1470 ; U1.45@-119.39,-1022.92 -576.47,-1480 -831.2,-1480 P17.8@-841.2,-1470
E15: J6.19 P15.20 U1.46 | length 1632.2
  Top Layer w7: v2(-1291.34,-1237.6) -1250,-1237.6 -1216.81,-1270.78 -1216.81,-1463.19 -1140,-1540 -609.02,-1540 -105.87,-1036.84 U1.46@-105.47,-1036.84

## Text inside footprints (layer, text, board x,y; h text height)
D1: Top Overlay "+" at 510,75 h30
D6: Top Overlay "+" at 627.99,75.55 h30
D7: Top Overlay "+" at 746.1,75.55 h30
D9: Top Overlay "+" at 864.21,76.81 h30
D13: Top Overlay "+" at -266.1,1198.86 h30 r90
D14: Top Overlay "+" at -446.1,1140.12 h30 r270
D15: Top Overlay "+" at -879.17,1563.35 h30 r270
J3: Bottom Overlay "2" at 1480.31,291.34 h40 r270; Bottom Overlay "1" at 1275.59,307.09 h40 r270; Bottom Overlay "23" at 1275.59,1574.8 h40 r270; Bottom Overlay "24" at 1480.31,1570.87 h40 r270
J4: Bottom Overlay "24" at 1314.96,-1513.58 h40 r90; Bottom Overlay "23" at 1519.69,-1517.52 h40 r90; Bottom Overlay "1" at 1519.69,-249.8 h40 r90; Bottom Overlay "2" at 1314.96,-234.06 h40 r90
J6: Bottom Overlay "24" at -1480.32,-1513.58 h40 r90; Bottom Overlay "23" at -1275.59,-1517.52 h40 r90; Bottom Overlay "1" at -1275.59,-249.8 h40 r90; Bottom Overlay "2" at -1480.32,-234.06 h40 r90
J7: Bottom Overlay "20" at -1480.32,537.01 h40 r90; Bottom Overlay "19" at -1275.59,533.07 h40 r90; Bottom Overlay "1" at -1275.59,1600.79 h40 r90; Bottom Overlay "2" at -1480.32,1616.54 h40 r90
J9: Top Overlay "3" at 368.31,1230.51 h40 r90; Top Overlay "1" at 368.31,956.89 h40 r90; Top Overlay "4" at 575,1230.51 h40 r90; Top Overlay "2" at 575,943.11 h40 r90
J10: Top Overlay "3" at -363.98,1006.1 h40; Top Overlay "1" at -637.6,1006.1 h40; Top Overlay "4" at -363.98,799.41 h40; Top Overlay "2" at -651.38,799.41 h40
J11: Top Overlay "3" at -718.31,1006.1 h40; Top Overlay "1" at -991.93,1006.1 h40; Top Overlay "4" at -718.31,799.41 h40; Top Overlay "2" at -1005.71,799.41 h40
J12: Top Overlay "2" at 299.17,13.19 h40 r180; Top Overlay "4" at 94.45,13.19 h40 r180; Top Overlay "3" at 94.45,288.78 h40 r180; Top Overlay "1" at 287.36,288.78 h40 r180
J13: Top Overlay "6" at -632.87,1360.43 h40; Top Overlay "5" at -628.94,1155.71 h40; Top Overlay "2" at -1012.4,1360.43 h40; Top Overlay "1" at -996.65,1155.71 h40
P1: Top Overlay "2" at -1068.31,-1090.28 h40 r90; Top Overlay "1" at -792.72,-1078.46 h40 r90; Top Overlay "5" at -792.72,-785.55 h40 r90; Top Overlay "6" at -1068.31,-785.55 h40 r90
P2: Top Overlay "1" at 1555.12,346.46 h40 r90; Top Overlay "2" at 1279.53,334.65 h40 r90; Top Overlay "23" at 1555.12,1531.5 h40 r90; Top Overlay "24" at 1279.53,1531.5 h40 r90
P3: Top Overlay "1" at 1240.16,-289.17 h40 r270; Top Overlay "2" at 1515.75,-277.36 h40 r270; Top Overlay "23" at 1240.16,-1474.21 h40 r270; Top Overlay "24" at 1515.75,-1474.21 h40 r270
P15: Top Overlay "24" at -1279.53,-1474.21 h40 r270; Top Overlay "23" at -1555.12,-1474.21 h40 r270; Top Overlay "2" at -1279.53,-277.36 h40 r270; Top Overlay "1" at -1555.12,-289.17 h40 r270
P16: Top Overlay "20" at -1279.53,572.44 h40 r270; Top Overlay "19" at -1555.12,572.44 h40 r270; Top Overlay "1" at -1555.12,1565.35 h40 r270; Top Overlay "2" at -1279.53,1577.17 h40 r270
P17: Top Overlay "8" at -826.89,-1510.55 h40 r270; Top Overlay "7" at -1102.48,-1510.55 h40 r270; Top Overlay "1" at -1102.48,-1117.64 h40 r270; Top Overlay "2" at -826.89,-1105.83 h40 r270
P18: Top Overlay "8" at 1128.11,-1135.55 h40 r270; Top Overlay "7" at 852.52,-1135.55 h40 r270; Top Overlay "1" at 852.52,-742.64 h40 r270; Top Overlay "2" at 1128.11,-730.83 h40 r270
P19: Top Overlay "2" at 1019.17,-533.11 h40 r180; Top Overlay "1" at 1007.36,-257.52 h40 r180; Top Overlay "5" at 714.45,-257.52 h40 r180; Top Overlay "6" at 714.45,-533.11 h40 r180